# Altium PCB USB_Board.PcbDoc
Units mil, origin at the board's own origin, x right, y up, seen from the top; angles counter-clockwise.
Board outline 4170 x 1790 mil, 2 copper layers (Top Layer, Bottom Layer); 34 components, 45 nets, 137 pads, 26 vias.
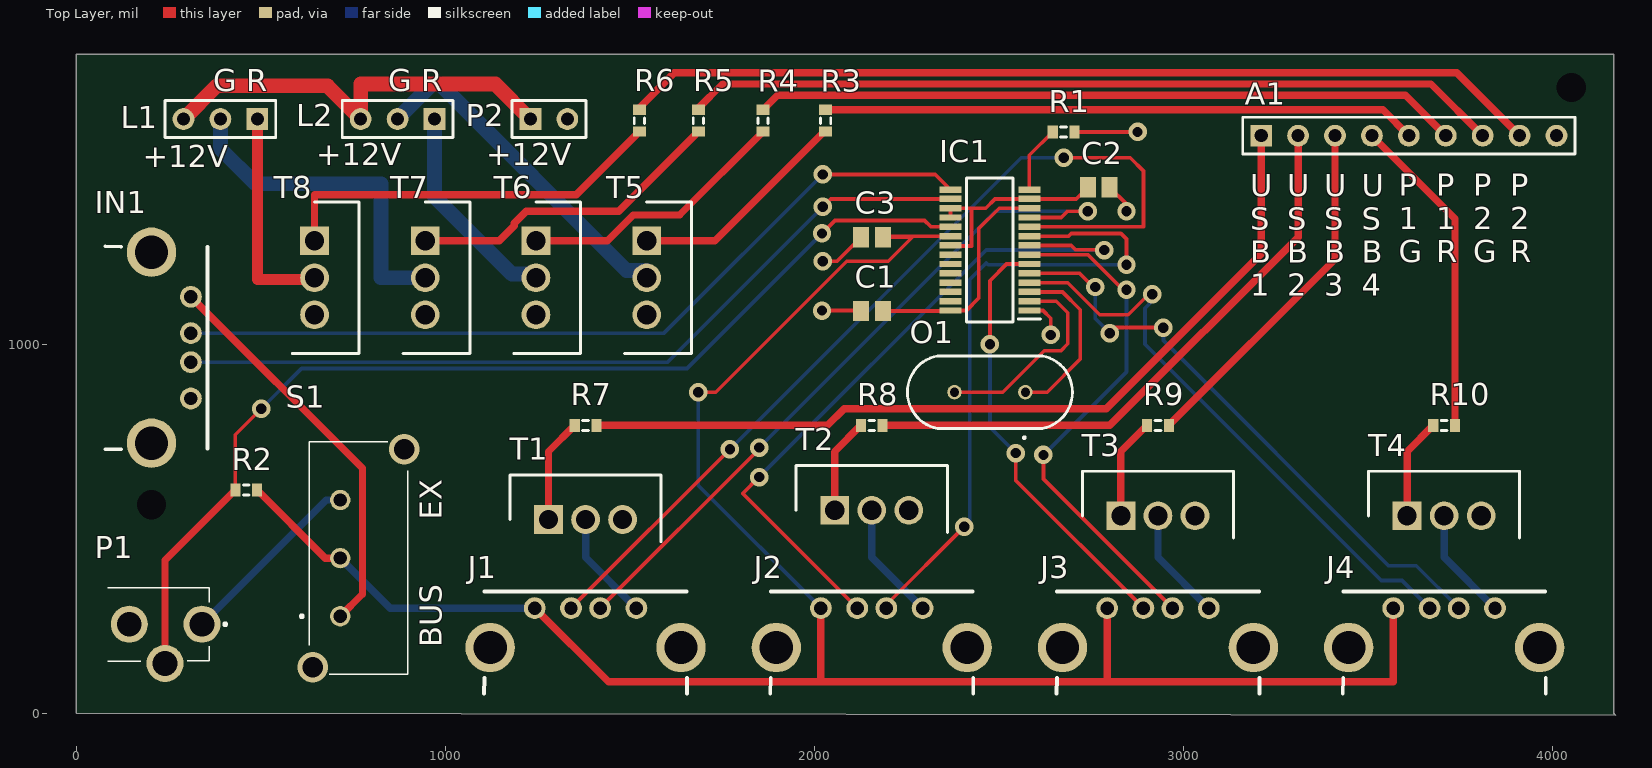
[diagram p0: Top Layer view]
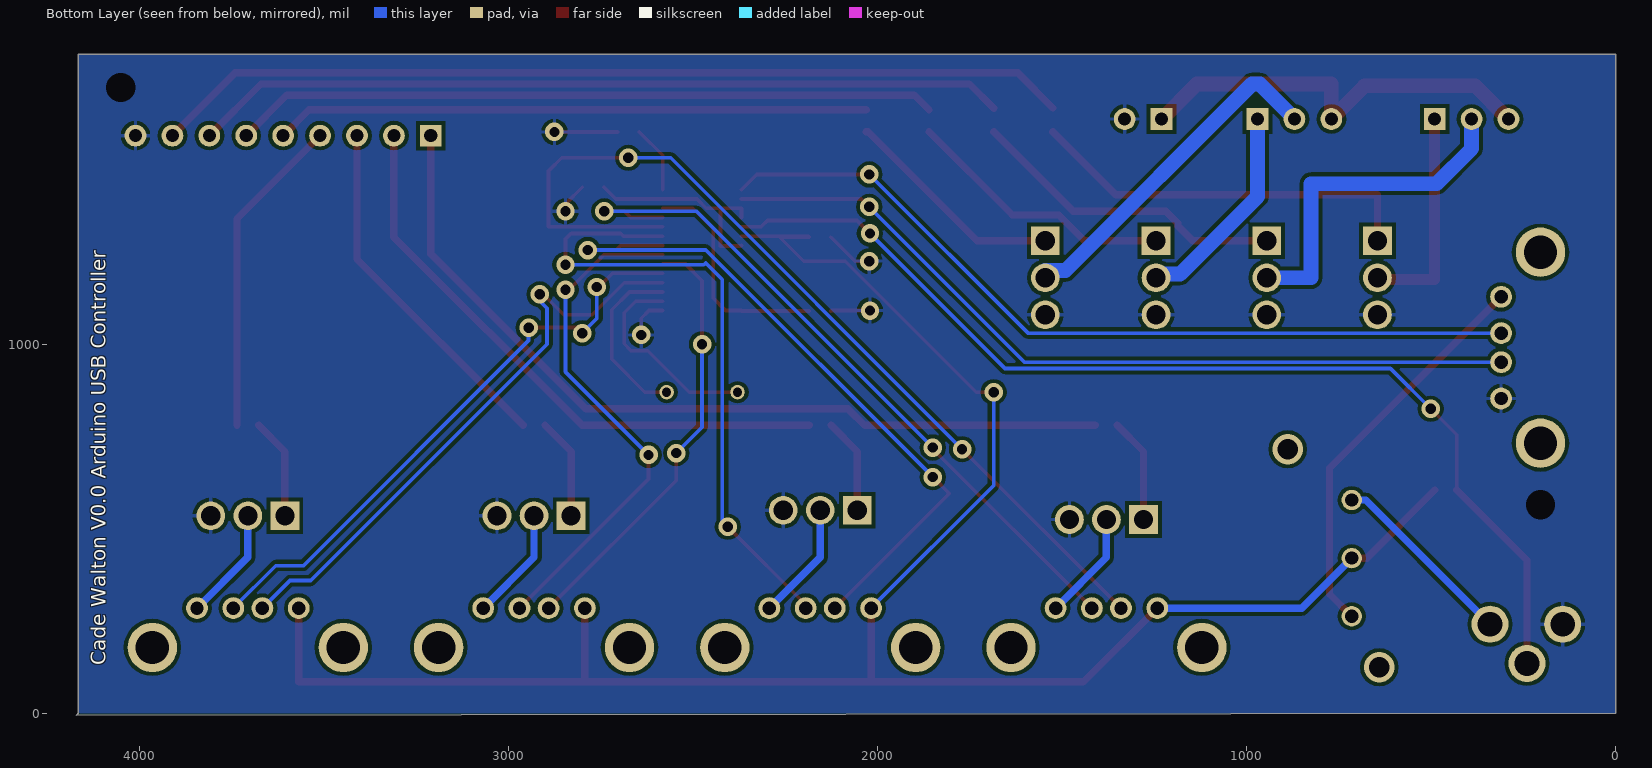
[diagram p1: Bottom Layer view, seen from below]

## Layer stack, top to bottom
Top Solder: solder mask 0.4, Solder Resist, Dk 3.5
Top Layer: signal copper 1.4
Dielectric 1: dielectric 12.6, FR-4, Dk 4.8
Bottom Layer: signal copper 1.4
Bottom Solder: solder mask 0.4, Solder Resist, Dk 3.5

## Board outline
0,0 0,1785 4165,1785 4165,0 4170,-5

## Design rules (kind name [scope] priority, off if disabled: settings)
Clearance [All] p1: gap=0 ignorepadtopadclearanceinfootprint=FALSE
PolygonConnect [All] p1: connectstyle=Relief reliefconductorwidth=10 reliefentries=4 polygonreliefangle="90 Angle" airgapwidth=10
RoutingVias [All] p1: holewidth=28 width=50 viastyle="Through Hole" minholewidth=28 minwidth=50 maxholewidth=28 maxwidth=50
SolderMaskExpansion [All] p1: expansion=4
Width [All] p1: maxlimit=40 minlimit=5 preferedwidth=20
30 further rules are at their usual default settings.

## Components (designator, comment, footprint, x,y, rotation, side; value= is the part's Value field where it differs from the comment)
A1 "Header 9" HDR1X9 3210,1565 r0 top
C1 "Cap Pol3" C0805 2155.47,1090 r180 top value=10uF
C2 "Cap Pol3" C0805 2770,1425 r0 top value=10uF
C3 "Cap Pol3" C0805 2155.47,1290 r180 top value=10uF
IC1 "FE1.1S" SOP64P600X175-28N 2475,1255 r180 top
IN1 "614004190021" USB-2.0-TYPE-A -202.2,990.63 r270 top
J1 "614004190021" USB-2.0-TYPE-A 1379.37,-227.2 r0 top
J2 "614004190021" USB-2.0-TYPE-A 2154.79,-227.2 r0 top
J3 "614004190021" USB-2.0-TYPE-A 2930.21,-227.2 r0 top
J4 "614004190021" USB-2.0-TYPE-A 3705.63,-227.2 r0 top
L1 "Header 3" HDR1X3 490,1610 r180 top
L2 "Header 3" HDR1X3 970,1610 r180 top
O1 "ECS-120-20-4" HC-49USX 2475,870 r180 top
P1 "PJ-031DH" PJ031DH 359.68,241.3 r0 top
P2 "Header 2" HDR1X2 1230,1610 r0 top
R1 "REXT" J1-0603 2674.53,1575 r180 top value=2.7K
R2 "Pullup" J1-0603 460,605 r0 top value=10K
R3 "Res3" J1-0603 2030,1605.47 r270 top value=1.5K
R4 "Res3" J1-0603 1860,1605.47 r270 top value=1.5K
R5 "Res3" J1-0603 1685,1605.47 r270 top value=1.5K
R6 "Res3" J1-0603 1525,1605.47 r270 top value=1.5K
R7 "Res3" J1-0603 1379.37,780 r180 top value=1.5K
R8 "Res3" J1-0603 2154.79,780 r180 top value=1.5K
R9 "Res3" J1-0603 2930.21,780 r180 top value=1.5K
R10 "Res3" J1-0603 3705.63,780 r180 top value=1.5K
S1 "MHS122K" MHS122K 764.02,420.28 r180 top
T1 "TIP120" TO255P460X1020X2008-3P 1278.98,525 r0 top
T2 "TIP120" TO255P460X1020X2008-3P 2054.4,550 r0 top
T3 "TIP120" TO255P460X1020X2008-3P 2829.82,535 r0 top
T4 "TIP120" TO255P460X1020X2008-3P 3605.24,535 r0 top
T5 "TIP120" TO255P460X1020X2008-3P 1545,1280.39 r270 top
T6 "TIP120" TO255P460X1020X2008-3P 1245,1280.39 r270 top
T7 "TIP120" TO255P460X1020X2008-3P 945,1280.39 r270 top
T8 "TIP120" TO255P460X1020X2008-3P 645,1280.39 r270 top

## Footprints (in the part's own frame and the unit in brackets; to place one, negate y for a bottom-side part, rotate by r counter-clockwise, add the part's x,y. Pads: shape width x height; smd on the part's side, far side on the other; paste and mask are expansions set on the pad)
C0805 [mm] "Chip Capacitor, Body 2.0x1.3mm, IPC High Density"
  rect 1.1x1.4 smd: 1(-0.75,0) 2(0.75,0)
  body extent -1.1,-0.72 1.1,0.72, height 1.4
HC-49USX [mm]
  round 1 hole 0.63: 1(-2.44,0) 2(2.44,0)
  silkscreen extent -5.68,-2.5 5.68,3.2
HDR1X2 [mm] "Connector; Header; 2 Position"
  rect 1.5x1.5 hole 0.9: 1(0,0)
  round 1.5 hole 0.9: 2(2.54,0)
  silkscreen extent -1.27,-1.27 3.81,1.27
HDR1X3 [mm] "Connector; Header; 3 Position"
  rect 1.5x1.5 hole 0.9: 1(0,0)
  round 1.5 hole 0.9: 2(2.54,0) 3(5.08,0)
  silkscreen extent -1.27,-1.27 6.35,1.27
HDR1X9 [mm] "Connector; Header; 9 Position"
  rect 1.5x1.5 hole 0.9: 1(0,0)
  round 1.5 hole 0.9: 2(2.54,0) 3(5.08,0) 4(7.62,0) 5(10.16,0) 6(12.7,0) 7(15.24,0) 8(17.78,0) 9(20.32,0)
  silkscreen extent -1.27,-1.27 21.59,1.27
J1-0603 [mm] "Chip Resistor, Body 1.6x0.8mm, IPC High Density"
  rect 0.7x0.9 smd: 1(-0.75,0) 2(0.75,0)
  silkscreen extent -0.2,-0.35 0.2,0.35, body extent -0.85,-0.48 0.85,0.48, height 0.9
MHS122K [mm]
  round 1.4 hole 0.9: 1(1.25,4) 2(1.25,-4) 3(1.25,0)
  round 2.1 hole 1.4: 4(3.15,7.5) 5(-3.15,-7.5)
  silkscreen extent -3.4,-8 4,8
PJ031DH [mm]
  round 2.55 hole 1.7: 1(-0.5,0) 2(-5.5,0) 3(-3.04,-2.7)
  silkscreen extent -6.98,-2.54 1.2,2.5, body extent -2.5,-3.2 2.9,7.4
SOP64P600X175-28N [mm]
  rect 1.525x0.44 smd: 1(-2.712,4.16) 2(-2.712,3.52) 3(-2.712,2.88) 4(-2.712,2.24) 5(-2.712,1.6) 6(-2.712,0.96) 7(-2.712,0.32) 8(-2.712,-0.32) 9(-2.712,-0.96) 10(-2.712,-1.6) 11(-2.712,-2.24) 12(-2.712,-2.88) 13(-2.712,-3.52) 14(-2.712,-4.16) 15(2.712,-4.16) 16(2.712,-3.52) 17(2.712,-2.88) 18(2.712,-2.24) 19(2.712,-1.6) 20(2.712,-0.96) 21(2.712,-0.32) 22(2.712,0.32) 23(2.712,0.96) 24(2.712,1.6) 25(2.712,2.24) 26(2.712,2.88) 27(2.712,3.52) 28(2.712,4.16)
  silkscreen extent -3.47,-4.95 1.6,4.95, body extent -3,-4.95 3,4.95, height 1.75
TO255P460X1020X2008-3P [mm]
  rect 1.98x1.98 hole 1.32: 1(0,0)
  round 1.98 hole 1.32: 2(2.55,0) 3(5.1,0)
  silkscreen extent -2.65,-1.53 7.75,3.07, body extent -2.55,-1.53 7.65,3.07, height 19.21
USB-2.0-TYPE-A [mm]
  round 1.5 hole 0.92: 1(-3.5,13.01) 2(-1,13.01) 3(1,13.01) 4(3.5,13.01)
  round 3.4 hole 2.3: 5(-6.57,10.3) 6(6.57,10.3)
  silkscreen extent -6.99,7.11 6.98,14.15

## Part data
A1: "Header, 9-Pin", LatestRevisionDate=17-Jul-2002, LatestRevisionNote="Re-released for DXP Platform.", Publisher="Altium Limited"
C1 C2 C3: "Polarized Capacitor (Surface Mount)", LatestRevisionDate=29-May-2009, LatestRevisionNote="IPC-7351 Footprint Added.", PackageDescription="Chip Capacitor", PackageReference=C0805, Published=8-Jun-2000, Publisher="Altium Limited"
IC1: "Integrated Circuit", Manufacturer_Name="JFD IC", Datasheet Link=https://cdn-shop.adafruit.com/product-files/2991/FE1.1s+Data+Sheet+(Rev.+1.0).pdf, Height=1.75mm, Manufacturer_Part_Number=FE1.1S
IN1 J1 J2 J3 J4: "Connector", Manufacturer_Name="Wurth Elektronik", Mouser Part Number=710-614004190021, RS Part Number=1622149, Datasheet Link=http://katalog.we-online.de/em/datasheet/614004190021.pdf, Manufacturer_Part_Number=614004190021, Mouser Price/Stock=https://www.mouser.com/Search/Refine.aspx?Keyword=710-614004190021, RS Price/Stock=http://uk.rs-online.com/web/p/products/1622149
L1 L2: "Header, 3-Pin", LatestRevisionDate=17-Jul-2002, LatestRevisionNote="Re-released for DXP Platform.", Publisher="Altium Limited"
O1: "Crystal or Oscillator", Manufacturer_Name=ECS, Mouser Part Number=520-HCU1200-20, Datasheet Link=https://ecsxtal.com/store/pdf/hc_49us.pdf, Manufacturer_Part_Number=ECS-120-20-4, Mouser Price/Stock=https://www.mouser.com/Search/Refine.aspx?Keyword=520-HCU1200-20
P1: "Connector", Manufacturer_Name=CUI, Mouser Part Number=490-PJ-031DH, Datasheet Link=https://www.cui.com/product/resource/pj-031dh.pdf, Height=7mm, Manufacturer_Part_Number=PJ-031DH, Mouser Price/Stock=https://www.mouser.com/Search/Refine.aspx?Keyword=490-PJ-031DH
P2: "Header, 2-Pin", LatestRevisionDate=17-Jul-2002, LatestRevisionNote="Re-released for DXP Platform.", Publisher="Altium Limited"
R1 R2: library part Res3, "Resistor", LatestRevisionDate=29-May-2009, LatestRevisionNote="IPC-7351 Footprint Added.", PackageDescription="Chip Resistor", PackageReference=J1-0603, Published=8-Jun-2000, Publisher="Altium Limited"
R3 R4 R5 R6 R7 R8 R9 R10: "Resistor", LatestRevisionDate=29-May-2009, LatestRevisionNote="IPC-7351 Footprint Added.", PackageDescription="Chip Resistor", PackageReference=J1-0603, Published=8-Jun-2000, Publisher="Altium Limited"
S1: "Switch", Manufacturer_Name=Apem, Mouser Part Number=642-MHS122K, Datasheet Link=https://componentsearchengine.com/Datasheets/1/MHS122K.pdf, Height=17mm, Manufacturer_Part_Number=MHS122K, Mouser Price/Stock=https://www.mouser.com/Search/Refine.aspx?Keyword=642-MHS122K
T1 T2 T3 T4 T5 T6 T7 T8: "Transistor Darlington Pair", Manufacturer_Name=STMicroelectronics, Mouser Part Number=511-TIP120, RS Part Number=3133175, Datasheet Link=https://www.st.com/resource/en/datasheet/cd00000911.pdf, Height=4.6mm, Manufacturer_Part_Number=TIP120, Mouser Price/Stock=https://www.mouser.com/Search/Refine.aspx?Keyword=511-TIP120, RS Price/Stock=http://uk.rs-online.com/web/p/products/3133175

## Free pads (board coordinates)
  round 0 hole 78.74 unplated: 2(203.31,565) 2(4050,1695)

## Via types
v1: diameter 50, hole 28, Top Layer to Bottom Layer, 26 vias

## Nets (pads, with @x,y where several pads share a name; then routed paths per layer and width w, separated by ;. In a path a pad name is that pad's centre, name@x,y a point inside that pad or via, vN(x,y) a via of type N, cw(c..) or ccw(c..) an arc to the next point about the centre after c; other vN are vias at no path point)
+12V: L1.3 L2.3 P2.1 | length 1148.9
  Top Layer w40: L1.3 380,1700 680,1700 L2.3 770,1705 1135,1705 P2.1
BUSJ: IC1.19 P1.3 R2.1 | length 2883.7
  Top Layer w10: R2.1 430.47,754.53 v1(500.94,825) ; v1(2020,1300) 2055,1335 2297.99,1335 2315,1317.99 IC1.19
  Top Layer w20: P1.3 240,414.53 R2.1
  Bottom Layer w10: v1(500.94,825) 610,934.06 1654.06,934.06 v1(2020,1300)
BUSVCC: IN1.1 S1.1 | length 1083.2
  Top Layer w20: IN1.1 775,663.43 775,322.99 S1.1
DM1: IC1.10 J1.2 | length 2544.6
  Top Layer w10: J1.2 v1(1770.55,715.55) v1@1780,725 ; IC1.10 2890.84,1317.99 2890.84,1469.16 2855,1505 v1(2675,1505)
  Bottom Layer w10: v1(1770.55,715.55) 2560,1505 v1(2675,1505)
DM2: IC1.8 J2.2 | length 1900.8
  Top Layer w10: v1(1849.58,640) 1805,595.42 J2.2 ; IC1.8 2695,1267.6 2706.53,1256.06 2783.94,1256.06 v1(2785,1255)
  Bottom Layer w10: v1(1849.58,640) 2464.79,1255.21 2465,1255 v1(2785,1255)
DM3: IC1.6 J3.2 | length 1184.9
  Top Layer w10: v1(2475,1000) 2475,1172.2 2520,1217.2 IC1.6 ; v1(2545,705) 2545,630.84 J3.2
  Bottom Layer w10: v1(2475,1000) 2475,775 v1(2545,705)
DM4: IC1.4 J4.2 | length 1602.7
  Top Layer w10: IC1.4 2685.99,1166.81 2772.8,1080 2850,1080 2905,1135 v1(2915,1135)
  Bottom Layer w10: v1(2915,1135) 2915,1117.08 2895,1097.08 2895,1000 3535,360 3591.26,360 J4.2
DMU: IC1.15 IN1.2 | length 2253.4
  Top Layer w10: v1(2021.99,1460) 2327.01,1460 IC1.15
  Bottom Layer w10: IN1.2 1591.99,1030 v1(2021.99,1460)
DP1: IC1.11 J1.3 | length 1933.9
  Top Layer w10: J1.3 1850,716.26 v1(1850,720) ; IC1.11 2668.19,1343.19 2685,1360 v1(2740,1360)
  Bottom Layer w10: v1(1850,720) 2490,1360 v1(2740,1360)
DP2: IC1.9 J2.3 | length 1771.6
  Top Layer w10: J2.3 2194.16,294.16 v1(2405,505) ; IC1.9 2687.8,1292.8 2695,1300 2829.82,1300 2845,1284.82 v1(2845,1215)
  Bottom Layer w10: v1(2405,505) 2420,520 2420,1175 2465,1220 2470,1215 v1(2845,1215)
DP3: IC1.7 J3.3 | length 1403
  Top Layer w10: IC1.7 2740.47,1242.4 2835.44,1147.44 v1(2845,1147.44) ; v1(2620,700) 2620,634.58 J3.3
  Bottom Layer w10: v1(2620,700) 2845,925 v1(2845,1147.44)
DP4: IC1.5 J4.3 | length 1621.9
  Top Layer w10: IC1.5 2717.99,1192.01 2755,1155 v1(2760,1155) ; v1(2799.53,1030) 2814.53,1045 v1(2945,1045)
  Bottom Layer w10: v1(2760,1155) 2760,1069.53 v1(2799.53,1030) ; v1(2945,1045) 2945,1010 3555,400 3630,400 J4.3
DPU: IC1.16 IN1.3 | length 2241.4
  Top Layer w10: v1(2021.99,1371.99) 2043.58,1393.58 IC1.16
  Bottom Layer w10: IN1.3 1601.26,951.26 v1(2021.99,1371.99)
EXVCC: P1.1 S1.2 | length 552.5
  Top Layer w20: P1.1 P1.1@378.35,241.3
  Bottom Layer w20: P1.1 676.46,577.76 S1.2
GND: A1.9 C1.2 C2.2 C3.2 IC1.1 IN1.4 P1.2 P2.2 pad.2 R1.1 T1.3 T2.3 T3.3 T4.3 T5.3 T6.3 T7.3 T8.3 | length 604.1
  Top Layer w10: v1(2020,1091.22) 2124.72,1091.22 C1.2 ; v1(2021.99,1225) 2060.94,1225 C3.2 ; IC1.1 2618.78,1091.22 2640,1070 v1(2640,1025) ; R1.1 v1(2875,1575) ; C2.2 2845,1379.53 v1(2845,1360)
J1VD: J1.4 T1.2 | length 297.1
  Bottom Layer w20: T1.2 1379.37,422.8 J1.4
J2VD: J2.4 T2.2 | length 322.1
  Bottom Layer w20: T2.2 2154.79,422.8 J2.4
J3VD: J3.4 T3.2 | length 307.1
  Bottom Layer w20: T3.2 2930.21,422.8 J3.4
J4VD: J4.4 T4.2 | length 307.1
  Bottom Layer w20: T4.2 3705.63,422.8 J4.4
NetIC1_2: IC1.2 O1.2 | length 562.6
  Top Layer w10: O1.2 2510,870 2622.35,982.35 2667.43,982.35 2685.99,1000.91 2685.99,1084.96 2654.53,1116.42 IC1.2
NetIC1_3: IC1.3 O1.1 | length 477.7
  Top Layer w10: O1.1 2630,870 2720,960 2720,1093.16 2671.55,1141.61 IC1.3
NetIC1_14: IC1.14 R1.2 | length 182.4
  Top Layer w10: IC1.14 2581.77,1511.77 R1.2
NetR3_2: R3.2 T5.1 | length 607.4
  Top Layer w20: T5.1 1730,1280.39 2025.55,1575.94 R3.2
NetR4_2: R4.2 T6.1 | length 755.8
  Top Layer w20: T6.1@1226.67,1280.39 T6.1 1438.76,1280.39 1508.37,1350 1634.06,1350 R4.2
NetR5_2: R5.2 T7.1 | length 866.6
  Top Layer w20: T7.1 1145.83,1280.39 1186.02,1320.58 1186.02,1327.65 1218.37,1360 1469.06,1360 R5.2
NetR6_2: R6.2 T8.1 | length 1075.4
  Top Layer w20: T8.1 645,1405 1354.06,1405 R6.2
NetR7_2: R7.2 T1.1 | length 284.4
  Top Layer w20: T1.1 1278.97,709.13 R7.2
NetR8_2: R8.2 T2.1 | length 259.4
  Top Layer w20: T2.1 2054.39,709.13 R8.2
NetR9_2: R9.2 T3.1 | length 274.4
  Top Layer w20: T3.1 2829.82,709.13 R9.2
NetR10_2: R10.2 T4.1 | length 274.4
  Top Layer w20: T4.1 3605.23,709.13 R10.2
P1G: L2.2 T5.2 | length 944.4
  Bottom Layer w40: L2.2 870,1611.48 963.52,1705 985,1705 1490,1200 1545,1200 T5.2
P1GA: A1.5 R3.1 | length 1609
  Top Layer w20: R3.1 3540,1635 A1.5
P1R: L2.1 T6.2 | length 576.1
  Bottom Layer w30: T6.2@1235,1190 T6.2
  Bottom Layer w40: L2.1 970,1400 1180,1190 T6.2@1235,1190
P1RA: A1.6 R4.1 | length 1912.1
  Top Layer w20: R4.1 1900,1675 3600,1675 A1.6
P2G: L1.2 T7.2 | length 929.4
  Bottom Layer w40: L1.2 390,1530 485,1435 825,1435 825,1180 T7.2
P2GA: A1.7 R5.1 | length 2210.1
  Top Layer w20: R5.1@1685,1639.53 1750.47,1705 3670,1705 A1.7
P2R: L1.1 T8.2 | length 591.4
  Top Layer w30: L1.1 490,1175.47 640.47,1175.47 T8.2
P2RA: A1.8 R6.1 | length 2494.8
  Top Layer w20: R6.1@1525,1640 1620,1735 3740,1735 A1.8
USB1: A1.1 R7.1 | length 2313.7
  Top Layer w20: R7.1 2035,780 2080,825 2790,825 3210,1245 A1.1
USB2: A1.2 R8.1 | length 1611.9
  Top Layer w20: R8.1 2800,780 3310,1290 A1.2
USB3: A1.3 R9.1 | length 971.5
  Top Layer w20: R9.1 3410,1230.26 A1.3
USB4: A1.4 R10.1 | length 878.3
  Top Layer w20: A1.4 3735.16,1339.84 R10.1
VD18: C1.1 IC1.12 IC1.28 | length 620.7
  Top Layer w10: C1.1 IC1.28@2367.01,1090 ; IC1.28 2411.22,1091.22 2445,1125 2445,1313.39 2500,1368.39 IC1.12
VD33: C2.1 IC1.13 IC1.17 IC1.18 IC1.21 | length 580.7
  Top Layer w10: IC1.21 2369.96,1265.87 2424.8,1265.87 2424.8,1368.39 ; IC1.18 IC1.17 2424.8,1368.39 ; C2.1 2709.05,1393.58 IC1.13 2488.58,1393.58 2463.39,1368.39 2424.8,1368.39
VDD5: C3.1 IC1.20 J1.1 J2.1 J3.1 J4.1 R2.2 S1.3 | length 5632.7
  Top Layer w10: v1(1685,870) 1731.99,870 2086.99,1225 2199.33,1225 2264.33,1290 C3.1 ; C3.1@2185,1291.26 2186.54,1292.8 IC1.20
  Top Layer w20: R2.2 674.25,420.28 S1.3 ; J1.1 1441.57,85 2016.99,85 ; J2.1 2016.99,85 ; J3.1 2792.41,85 ; J4.1 3567.83,85 2792.41,85 ; 2016.99,85 2792.41,85
  Bottom Layer w10: v1(1685,870) 1685,616.99 J2.1
  Bottom Layer w20: S1.3 850.08,285 J1.1
pads on no net: IC1.22 IC1.23 IC1.24 IC1.25 IC1.26 IC1.27 IN1.5 IN1.6 J1.5 J1.6 J2.5 J2.6 J3.5 J3.6 J4.5 J4.6 S1.4 S1.5

## Polygon pours and split planes (outlines as drawn)
no net on Multi-Layer (solid): -2.5,1762.5
GND on Bottom Layer "GND_POUR" (solid, pour order 6): 0,1785 4165,1785 4165,-5 4160,0 0,0

## Silkscreen, mask and mechanical layers (free items; w line width, h text height)
Top Overlay:
  text "G R" at 370,1685 h60
  text "G R" at 845,1685 h60
  text "+12V" at 650,1485 h60
  text "+12V" at 1110,1485 h60
  text "+12V" at 180,1480 h60
  text "P / 1 / G" at 3582.86,1222 h60
  text "P / 1 / R" at 3683.57,1222 h60
  text "P / 2 / G" at 3784.29,1222 h60
  text "P / 2 / R" at 3885,1222 h60
  text "U / S / B / 1" at 3180,1130.66 h60
  text "U / S / B / 2" at 3280.71,1130.66 h60
  text "U / S / B / 3" at 3381.43,1130.66 h60
  text "U / S / B / 4" at 3482.14,1130.66 h60
  text "EX" at 990,525 h60 r90
  text "BUS" at 990,178.31 h60 r90
Bottom Overlay:
  text "Cade Walton V0.0 Arduino USB Controller" at 4090,130 h40 r270
Mechanical 13:
  lines w10: 0,67.39 ccw(c67.39,67.39) 67.39,0 4096.72,0 ccw(c4096.72,68.28) 4165,68.28 4165,1716.72 ccw(c4096.72,1716.72) 4096.72,1785 68.28,1785 ccw(c68.28,1716.72) 0,1716.72 0,67.39

## Dimensions
290,1610 to 390,1610 on Mechanical 15